# Altium PCB Odrive.PcbDoc (part 3 of 4)
Units mil, origin at the board's own origin, x right, y up, seen from the top; angles counter-clockwise.
Board outline 2874.02 x 1968.5 mil, 4 copper layers (Top Layer, Power, Signal, Bottom Layer), stack 74.892 mil thick; 198 components, 162 nets, 717 pads, 948 vias.
Unrouted connection lines stored in the file: 81.
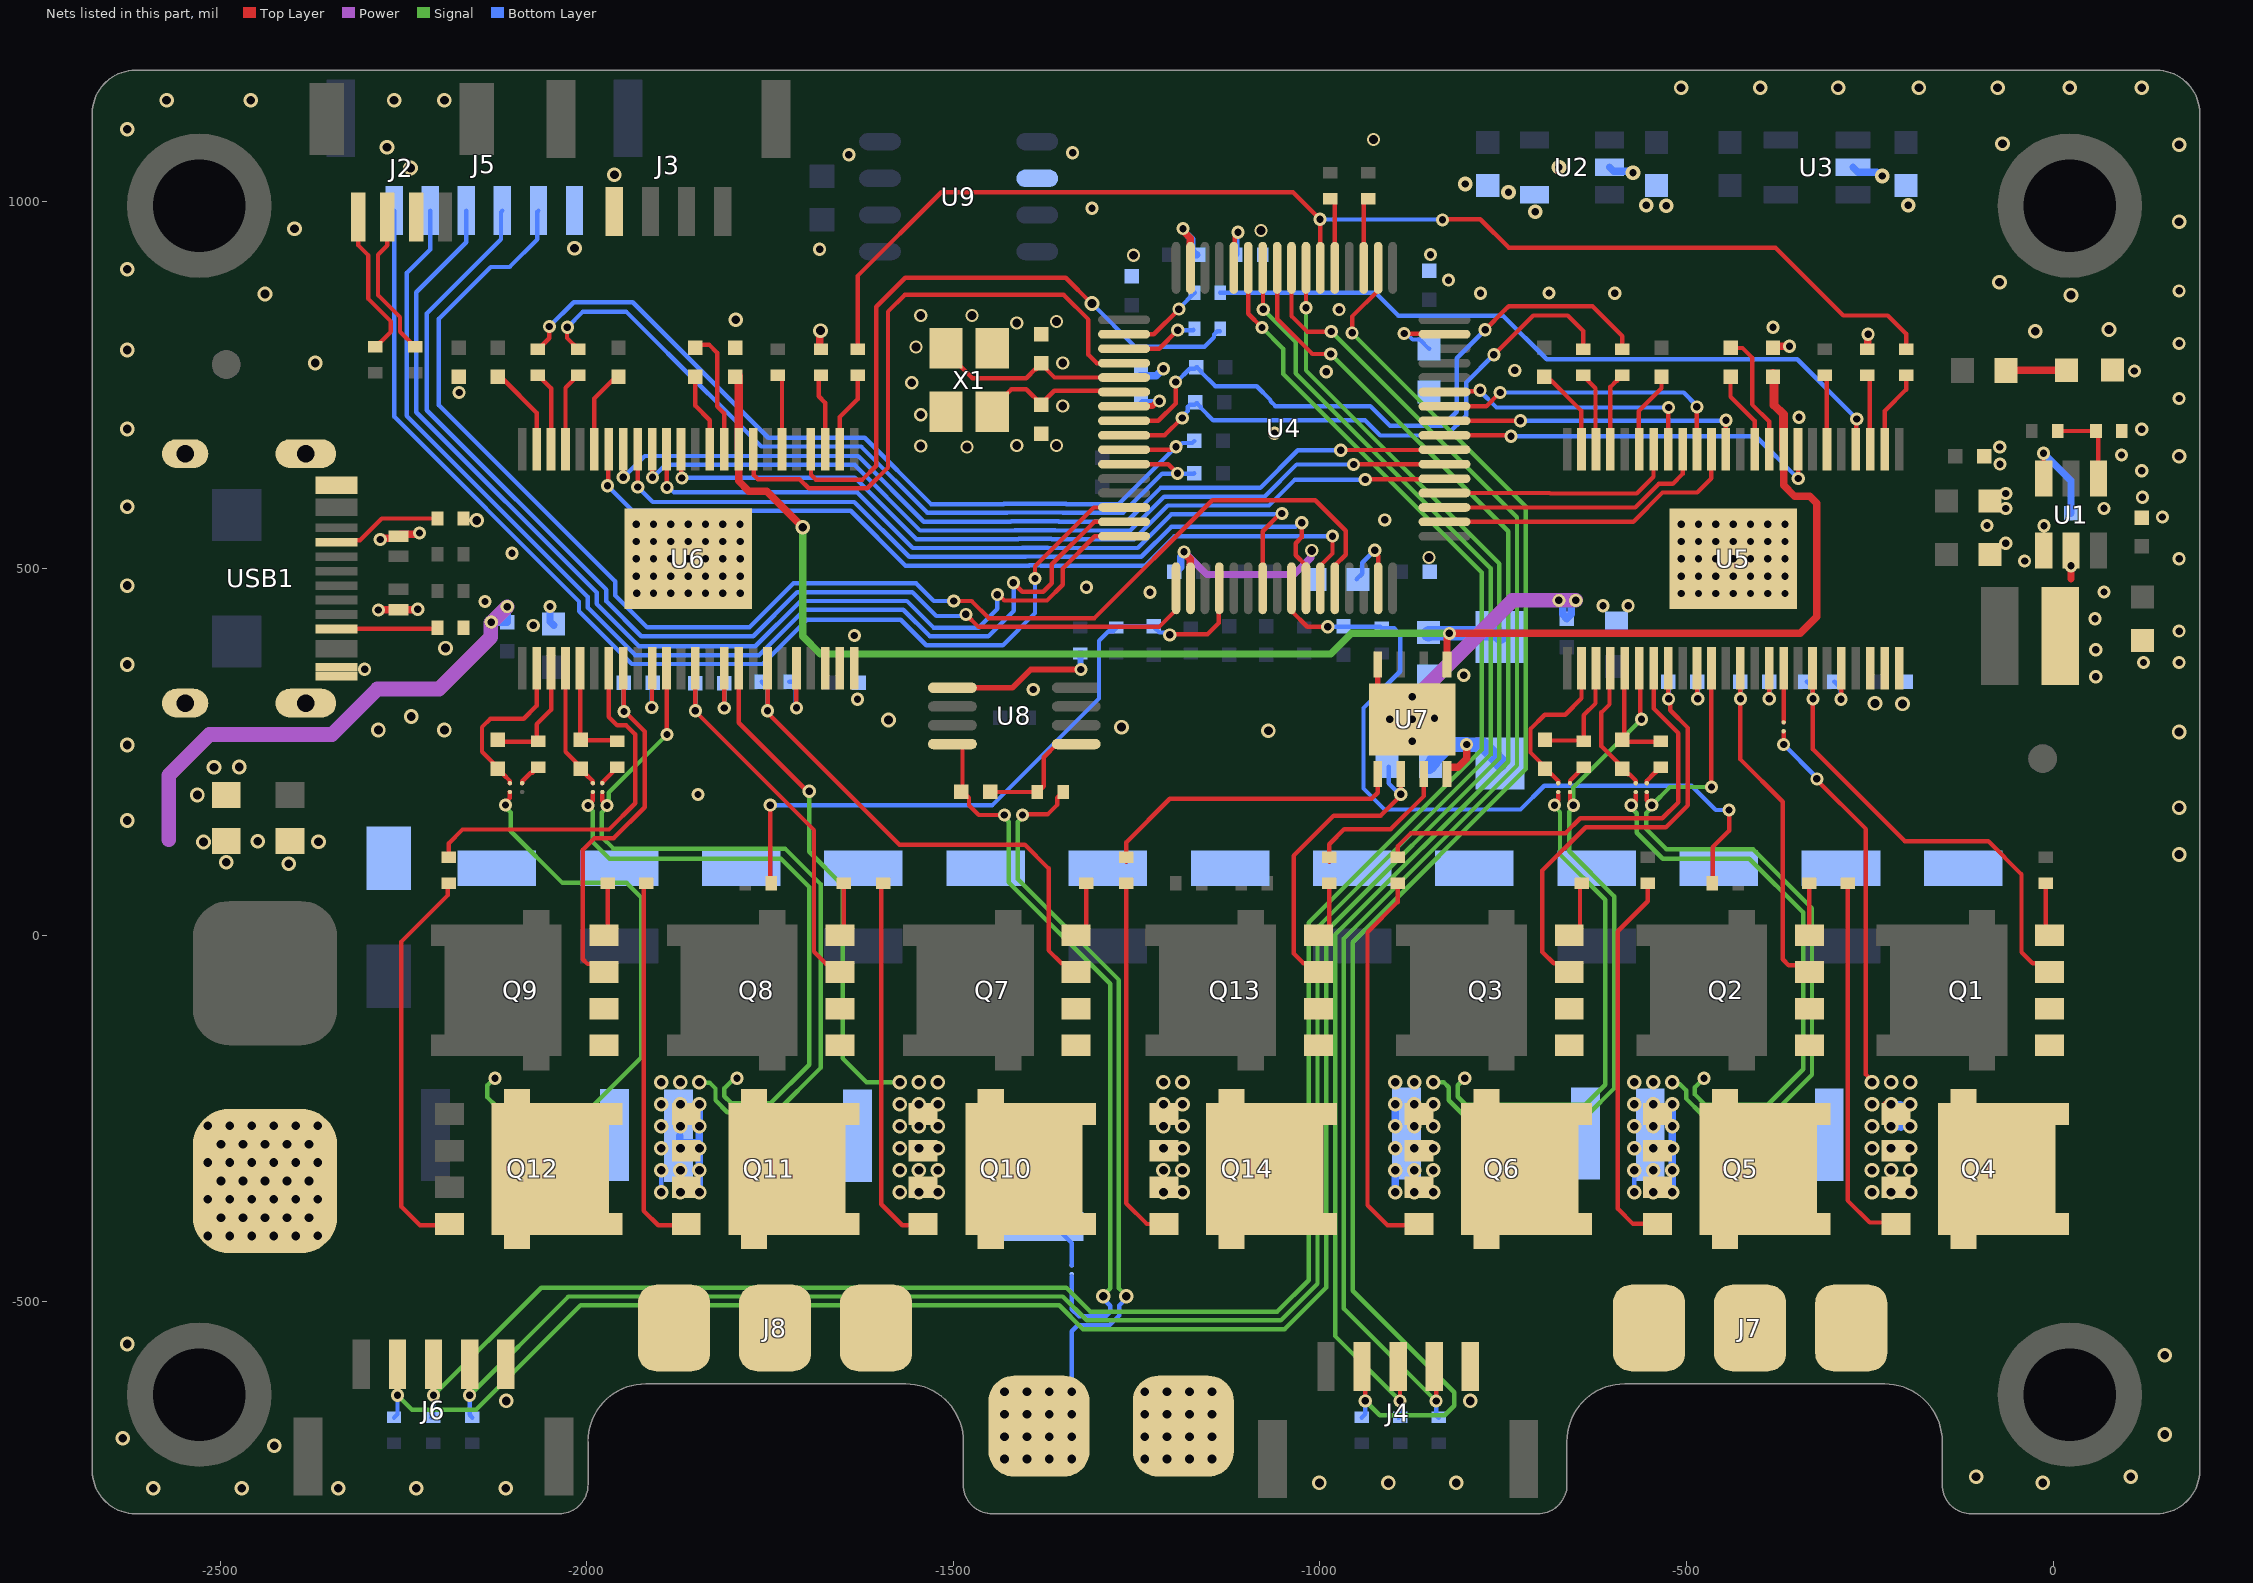
[diagram p4: the nets of this part, all layers, seen from the top]

## Via types
v1: diameter 20, hole 12, Top Layer to Bottom Layer, tented both sides, 616 vias
v2: diameter 18, hole 10, Top Layer to Bottom Layer, tented both sides, 296 vias
v3: diameter 18, hole 12, Top Layer to Bottom Layer, tented both sides, 18 vias
v4: diameter 20, hole 10, Top Layer to Bottom Layer, tented both sides, 18 vias

## Nets (pads, with @x,y where several pads share a name; then routed paths per layer and width w, separated by ;. In a path a pad name is that pad's centre, name@x,y a point inside that pad or via, vN(x,y) a via of type N, cw(c..) or ccw(c..) an arc to the next point about the centre after c; other vN are vias at no path point) (continued)
GL_C: R32.1 U5.31 | length 620.3
  Top Layer w6: R32.1@-894.12,105.38 -894.12,121.09 -875.97,139.24 -664.96,139.24 -644.85,159.35 -533.11,159.35 -511.35,181.12 -511.35,275.65 -544.81,309.11 U5.31@-544.81,364.17
GL_C_nP: R48.2 U6.31 | length 503.3
  Top Layer w6: R48.2@-2187.84,105.38 -2187.84,125.57 -2169.3,144.11 -1969.56,144.11 -1933.61,180.05 -1933.61,273.81 -1945.95,286.15 -1958.23,286.15 -1969.81,297.72 U6.31@-1969.81,364.17
GND: C2.1 C3.1 C4.1 C5.1 C6.1 C20.1 C21.1 C23.1 C25.1 C26.1 C27.1 C28.1 C29.2 C30.2 C31.1 C32.1 C33.1 C34.1 C35.1 C38.1 C40.1 C51.1 C53.1 C55.1 C66.1 D4.2 D5.2 FB1.1 J2.2 J3.4 J4.5 J5.6 J6.5 LED1.2 R2.1 R6.1 R8.2 R18.2 R28.2 R44.2 U1.1 U2.2 U2.4 U3.2 U4.18 U4.63 U5.46 U5.47 U5.48 U5.49 U6.46 U6.47 U6.48 U6.49 U9.2 USB1.0 USB1.A1 USB1.A12 USB1.B1 USB1.B12 X1.G | length 715.4
  Top Layer w10: v2(-2284.02,443.55) -2283.55,444.02 -2230.87,444.02 v2(-2230.4,444.49) ; v2(-2281.37,539.74) -2279.21,539.74 -2277.48,541.47 -2259.29,541.47 D5.2@-2256.42,544.35 -2253.76,547.01 -2229.47,547.01 v2(-2227.94,548.54) ; R44.2@-1683.54,801.42 -1682.32,802.64 -1682.32,823.33 v1(-1681.1,824.55) ; v2(-1186.65,963.61) -1185.12,962.08 -1185.12,959 -1176.87,950.75 -1176.87,910.47 U4.63@-1176.52,910.12 ; v2(-1185.31,522.73) -1185.31,521.31 -1176.87,512.87 -1176.87,473.46 U4.18@-1176.53,473.11 ; C40.1@-382.14,803.3 v2(-359.54,803.3) ; R28.2@-253.68,798.57 -253.07,799.18 -253.07,818.95 v2(-252.45,819.57)
  Power w10: v2(-1185.31,522.73) -1154.51,491.93 -1035.47,491.93 -1012.68,514.72 -1012.68,523.31 v3(-1011.15,524.84)
  Bottom Layer w10: v2(-2050.08,448.3) -2050.08,427.55 C66.1@-2045.08,422.55 ; C28.1@-1245.35,763.05 -1223.01,763.05 -1213.65,772.41 v2(-1213.46,772.41) ; C32.1@-1196.77,495.65 -1195.79,495.65 -1189.96,501.48 -1189.96,515.91 -1185.31,520.56 v2(-1185.31,522.73) ; v2(-1186.65,963.61) -1186.65,960.96 -1174.99,949.3 -1174.99,933.96 -1169.16,928.13 C35.1@-1168.18,928.13 ; U2.2@-605,1047.17 -599.66,1041.83 -574.95,1041.83 v4(-573.03,1039.92) ; U3.2@-272.99,1047.17 -266.17,1040.36 -240.69,1040.36 -235.69,1035.36 v4(-232.99,1035.36)
  other v1: -2591,-754.21 -2470.36,-754.21 -2338.73,-754.21 -2232.42,-754.21 -2110.39,-754.21 -1000.71,-746.9 -906.68,-746.9 -814.11,-746.9 -14.36,-746.9 -105.16,-738.41 105.64,-738.41 -2425.92,-696.14 -2632.72,-685.92 152.21,-680.82 -2109.54,-635.04 -794.9,-635.04 152.21,-572.95 -2626.61,-557.55 171.67,110.13 -2626.61,156.49 171.67,173.98 -2530.85,191.23 -2508.2,229.12 -2473.74,229.34 -2626.61,259.39 171.67,277.11 -1070.31,278.89 -2284.02,279.83 -2194.05,279.83 -1270.69,283.78 -1588.33,293.46 -2239.29,298.19 -243.05,316.11 -205.53,315.48 -2626.61,369.25 -2192.46,391.49 -2626.61,476.71 -2149.96,565.73 -2626.61,584.22 171.67,653.22 -2626.61,690.43 -2370.01,780.28 -2626.61,798 -24.47,823.75 76.1,826.12 -1796.73,839.25 24.31,872.93 -2438.57,874.53 -73.31,890.35 -2626.61,908.14 -2016.51,936.73 -2398.53,963.43 171.67,973.06 -1962.21,1037.18 -2240.25,1046.23 -2272.39,1074.59 171.67,1078.04 -69.22,1079.29 -2626.61,1099.15 -2572.87,1138.76 -2458.18,1138.76 -2262.57,1138.76 -2194.05,1138.76 -507.41,1155.71 -399.65,1155.71 -293.29,1155.71 -183.16,1155.71 -75.78,1155.71 22.64,1155.71 120.78,1155.71
  other v2: -1848.05,191.8 -1630.54,321.7 -1390.97,335.14 58.08,352.55 -803.92,354.41 -2302.83,362.69 123.15,371.9 171.67,371.9 58.08,389.18 -1634.9,408.72 171.67,414.73 -2072.91,422.55 56.96,431.69 -613.92,449.3 -579.71,449.3 -2138.69,455.05 -1931.85,466.38 -1908.79,466.38 -1885.17,466.38 -1861.54,466.38 -1837.92,466.38 -1814.3,466.38 -1790.68,466.38 -507.41,466.06 -483.79,466.06 -460.17,466.06 -436.54,466.06 -412.92,466.06 -389.3,466.06 -365.68,466.06 -1231.65,467.61 69.24,467.94 -1318.53,474.6 -1932.41,489.68 -1908.79,489.68 -1885.17,489.68 -1861.54,489.68 -1837.92,489.68 -1814.3,489.68 -1790.68,489.68 -507.41,489.68 -483.79,489.68 -460.17,489.68 -436.54,489.68 -412.92,489.68 -389.3,489.68 -365.68,489.68 -39.03,510.34 -1932.41,513.3 -1908.79,513.3 -1885.17,513.3 -1861.54,513.3 -1837.92,513.3 -1814.3,513.3 -1790.68,513.3 -507.41,513.3 -483.79,513.3 -460.17,513.3 -436.54,513.3 -412.92,513.3 -389.3,513.3 -365.68,513.3 171.67,513.3 -2101.73,520.86 -64.7,534.61 -1932.41,536.93 -1908.79,536.93 -1885.17,536.93 -1861.54,536.93 -1837.92,536.93 -1814.3,536.93 -1790.68,536.93 -507.41,536.93 -483.79,536.93 -460.17,536.93 -436.54,536.93 -412.92,536.93 -389.3,536.93 -365.68,536.93 -90.29,558.78 -12.66,558.41 -1932.38,560.52 -1908.79,560.55 -1885.17,560.55 -1861.54,560.55 -1837.92,560.55 -1814.3,560.55 -1790.86,560.55 -507.41,560.55 -483.79,560.55 -460.17,560.55 -436.54,560.55 -412.92,560.55 -389.3,560.55 -365.68,560.55 -911.6,566.37 148.84,570.22 -64.7,581.81 69.24,582.03 121.61,597.13 -64.7,602.28 120.78,633.4 -72.47,642.41 93.09,654.99 -72.8,665.75 -1062.04,684.42 120.78,689.89 -346.58,706.47 171.67,731.83 -2173.97,740.14 -991.31,768.43 110.7,769.32 -734.33,770.3 171.67,807.07 -382.14,829.09 -973.8,853.12 -780.99,875.4 -597.9,875.4 -687.54,875.81 171.67,878.71 -824.59,893.4 -849.18,928.13 -1682.32,935.45 -1310.95,991.4 -1642.35,1064.41 -1337.32,1067.18
  other v3: -851.28,514.99 -1481.26,665.6 -1544.47,667.25 -1413.51,668 -1359.36,668 -1544.47,709.88 -1350.77,721.87 -1556.54,753.3 -1350.77,780.2 -1550.97,802.2 -1413.51,835.08 -1359.36,837.11 -1544.47,845.16 -1474.31,845.16 -1254.36,927.41 -1080.24,960.84 -927.12,1085.12
  other v4: -706.54,986.56 -527.5,994.79 -555.09,995.55 -197.47,995.55 -742.82,1013.21 -801.64,1024.35 -674.02,1047.17
GPIO_1: J5.1 U4.14 | length 1578.5
  Top Layer w6: v2(-1388.61,486.47) -1388.61,503.16 -1308.41,583.35 U4.14@-1267.08,583.35
  Bottom Layer w6: J5.1@-2262.57,988.17 -2262.57,707.29 -2010.39,455.11 -2010.39,441.85 -1938.46,369.91 -1760.01,369.91 -1699.58,430.34 -1571.7,430.34 -1536.9,395.54 -1432.37,395.54 -1388.61,439.3 v2(-1388.61,486.47)
GPIO_2: J5.2 U4.15 | length 1569.1
  Top Layer w6: v2(-1418.03,480.69) -1405.8,468.47 -1377.19,468.47 -1365.58,480.08 -1365.58,505.99 -1307.9,563.66 U4.15@-1267.08,563.66
  Bottom Layer w6: J5.2@-2213.36,988.17 -2213.36,935.08 -2245.25,903.19 -2245.25,708.23 -1998.39,461.37 -1998.39,446.82 -1933.49,381.91 -1764.98,381.91 -1703.07,443.82 -1568.21,443.82 -1531.93,407.54 -1452.09,407.54 -1417.33,442.31 -1417.33,479.99 v2(-1418.03,480.69)
GPIO_3: J5.3 U4.16 | length 1533
  Top Layer w6: v2(-1439.84,464.44) -1438.3,464.44 -1430.33,456.47 -1372.22,456.47 -1350.83,477.86 -1350.83,500.16 -1307,543.98 U4.16@-1267.08,543.98
  Bottom Layer w6: J5.3@-2164.14,988.17 -2164.14,944.88 -2232.36,876.66 -2232.36,713.28 -1986.39,467.31 -1986.39,451.79 -1928.52,393.91 -1769.95,393.91 -1708.04,455.82 -1563.24,455.82 -1526.96,419.54 -1465.38,419.54 -1439.84,445.08 v2(-1439.84,464.44)
GPIO_4: J5.4 U4.17 | length 1559
  Top Layer w6: v2(-1482.87,437.56) -1465.78,420.47 -1219.33,420.47 -1196.21,443.59 U4.17@-1196.21,473.11
  Bottom Layer w6: J5.4@-2114.93,988.17 -2116.77,986.32 -2116.77,949.22 -2218.09,847.9 -2218.09,715.98 -1973.1,470.99 -1973.1,455.47 -1925.49,407.86 -1772.97,407.86 -1713.01,467.82 -1555.73,467.82 -1523.18,435.26 -1485.16,435.26 v2(-1482.87,437.56)
GPIO_5: J5.5 U4.28 | length 1922.7
  Top Layer w6: v2(-1499.27,455.71) -1475.05,455.71 -1451.81,432.47 -1307.48,432.47 -1146.88,593.06 -1006.26,593.06 -964.89,551.69 -964.89,518.82 -979.68,504.03 U4.28@-979.68,473.11
  Bottom Layer w6: J5.5@-2065.72,988.17 -2067.18,986.71 -2067.18,949.22 -2105.07,911.32 -2130.7,911.32 -2201.55,840.48 -2201.55,722.95 -1961.1,482.5 -1961.1,463.33 -1917.62,419.86 -1777.94,419.86 -1717.98,479.82 -1550.76,479.82 -1526.65,455.71 v2(-1499.27,455.71)
GVDD: C40.2 C55.2 C69.2 D3.2 U5.9 U6.9 U7.1 | length 2332.1
  Top Layer w10: U6.9@-1792.65,662.44 -1792.65,619.48 -1778.74,605.57 -1754.55,605.57 v1(-1705.38,556.4) ; U7.1@-826.73,369 -826.73,406.2 -823.49,409.44 v2(-823.49,411.61) -345.06,411.61 -322.37,434.29 -322.37,589.25 -331.89,598.78 -352.86,598.78 -367.65,613.57 U5.9@-367.65,662.44
  Top Layer w12: U6.9@-1792.65,662.44 C55.2@-1792.65,762.44 ; C40.2@-382.14,765.9 -380.75,764.51 -380.75,723.13 -367.65,710.03 U5.9@-367.65,662.44
  Signal w10: v1(-1705.38,556.4) -1705.38,407.58 -1681.24,383.44 -985.12,383.44 -956.96,411.61 v2(-823.49,411.61)
  Bottom Layer w20: C69.2@-852.2,410.6 -851.2,411.61 -759.01,411.61 D3.2@-754.28,406.88
M0_ENC_A: J4.4 R14.1 U4.56 | length 1913.9
  Top Layer w6: U4.56@-1038.73,910.12 -1038.73,844.32 -1017.65,823.23 v2(-984.64,823.23) ; J4.4@-844.11,-588.33 -841.57,-590.87 v2(-841.57,-635.25)
  Signal w6: v2(-984.64,823.23) -731.25,569.84 -731.25,231.58 -967.31,-4.48 -967.31,-509.51 v2(-841.57,-635.25)
  Bottom Layer w6: v2(-841.57,-635.25) -841.57,-654.52 R14.1@-838.2,-657.89
M0_ENC_B: J4.3 R13.1 U4.57 | length 1896.3
  Top Layer w6: U4.57@-1058.41,910.12 -1058.41,840.77 -1010.28,792.64 v2(-985.14,792.64) ; J4.3@-893.32,-588.33 -890.82,-590.83 v2(-890.82,-635.04)
  Signal w6: v2(-985.14,792.64) -743.25,550.75 -743.25,236.55 -979.31,0.49 -979.31,-546.56 v2(-890.82,-635.04)
  Bottom Layer w6: R13.1@-892.87,-657.89 -890.82,-655.84 v2(-890.82,-635.04)
M0_ENC_Z: J4.2 R12.1 U4.50 | length 2028.4
  Top Layer w6: v2(-956.12,821.41) -956.12,843.7 -920.62,879.2 U4.50@-920.62,910.12 ; J4.2@-942.53,-588.33 -938.15,-592.72 v2(-938.15,-635.04)
  Signal w6: v2(-956.12,821.41) -719.25,584.54 -719.25,226.61 -955.31,-9.45 -955.31,-484.73 -816.72,-623.33 -816.72,-641.72 -829.83,-654.83 -918.36,-654.83 v2(-938.15,-635.04)
  Bottom Layer w6: R12.1@-943.16,-657.89 -938.15,-652.88 v2(-938.15,-635.04)
M0_nCS: R21.1 U5.4 | length 981.7
  Top Layer w6: U5.4@-269.22,662.44 -268.59,663.07 -268.59,703.4 v2(-267.96,704.03)
  Bottom Layer w6: R21.1@-1136.33,876.04 -924.19,876.04 -892.95,844.8 -750.31,844.8 -690.82,785.3 -349.23,785.3 v2(-267.96,704.03)
M0_SN1: NT2.1 R33.1 | length 30.6
  Top Layer w6: NT2.1@-554.36,207.33 -554.36,210.37 -543.23,221.49 -542.73,221.49 -535.1,229.12 R33.1@-535.1,229.63
M0_SN2: NT3.1 R38.1 | length 30
  Top Layer w6: NT3.1@-658.94,207.33 -658.94,210.6 -640.42,229.12 R38.1@-640.42,229.63
M0_SP1: C45.1 NT4.1 U5.28 | length 182.4
  Top Layer w6: U5.28@-603.87,364.17 -605.15,362.89 -605.15,314.77 -616.08,303.84 -616.08,257.66 -587.76,229.34 -587.76,227.37 -579.93,219.54 -577.96,219.54 -569.32,210.89 NT4.1@-569.32,207.33
M0_SP2: C46.1 NT5.1 U5.26 | length 218.5
  Top Layer w6: NT5.1@-674.99,207.33 -674.99,210.27 -684.27,219.54 -685.25,219.54 -693.08,227.37 -693.08,228.35 -693.08,229.34 -712.91,249.16 -712.91,281.29 -693.42,300.77 -665.62,300.77 -643.24,323.16 -643.24,363.57 U5.26@-643.83,364.17
M0_TEMP: C37.2 R23.1 RT1.2 U4.25 | length 1070.3
  Top Layer w6: U4.25@-1038.73,473.11 -1038.73,442.19 -1017.22,420.68 v2(-989.45,420.68) ; RT1.2@-464.29,70.8 -464.29,120.13 -442.05,142.37 v2(-442.05,170.77)
  Bottom Layer w6: v2(-989.45,420.68) -968.01,420.68 -967.89,420.81 -917.74,420.81 -915.87,418.94 -898.9,418.94 -890.57,410.6 -890.57,359.93 -940.63,309.87 -940.63,200.08 -911.99,171.43 -726.52,171.43 -694.14,203.81 -493.27,203.81 -460.22,170.77 v2(-442.05,170.77)
M1_ENC_A: J6.4 R17.1 U4.58 | length 2932.7
  Top Layer w6: v2(-2159.6,-627.48) J6.4@-2159.6,-585.08 ; U4.58@-1078.1,910.12 -1077.7,909.72 -1077.7,853.82 v2(-1077.31,853.42)
  Signal w6: v2(-2159.6,-627.48) -2024.85,-492.73 -1350.71,-492.73 -1318.17,-525.26 -1053.17,-525.26 -1003.31,-475.4 -1003.31,10.43 -767.25,246.49 -767.25,500.4 -1033.02,766.17 -1033.02,809.13 v2(-1077.31,853.42)
  Bottom Layer w6: v2(-2159.6,-627.48) -2159.6,-654.08 R17.1@-2155.8,-657.89
M1_ENC_B: J6.3 R16.1 U4.59 | length 2969.8
  Top Layer w6: v2(-2208.81,-627.48) J6.3@-2208.81,-585.08 ; U4.59@-1097.78,910.12 -1097.78,847.47 v2(-1079.02,828.7)
  Signal w6: v2(-2208.81,-627.48) -2062.06,-480.73 -1345.74,-480.73 -1313.2,-513.26 -1058.14,-513.26 -1015.31,-470.43 -1015.31,17.17 -779.25,253.24 -779.25,494.67 -1049.88,765.3 -1049.88,799.56 v2(-1079.02,828.7)
  Bottom Layer w6: R16.1@-2211.75,-657.89 -2208.81,-654.95 v2(-2208.81,-627.48)
M1_ENC_Z: J6.2 R15.1 U4.55 | length 3043.3
  Top Layer w6: v2(-2258.02,-627.48) J6.2@-2258.02,-585.08 ; v2(-1019.04,855.69) U4.55@-1019.05,910.12
  Signal w6: v2(-2258.02,-627.48) -2238.24,-647.26 -2150.8,-647.26 -2008.27,-504.73 -1355.68,-504.73 -1323.14,-537.26 -1048.2,-537.26 -991.31,-480.37 -991.31,5.46 -755.25,241.52 -755.25,506.47 -1019.04,770.27 v2(-1019.04,855.69)
  Bottom Layer w6: R15.1@-2262.71,-657.89 -2258.02,-653.2 v2(-2258.02,-627.48)
M1_nCS: R22.1 U6.4 | length 886.2
  Top Layer w6: U6.4@-1694.22,662.44 -1694.08,662.3 -1694.08,627.92 -1687.52,621.36 -1623.86,621.36 -1605.03,640.19 -1605.03,857.16 -1565.61,896.58 -1346.6,896.58 -1311.58,861.56 v1(-1310.95,861.56)
  Bottom Layer w6: v1(-1310.95,861.56) -1310.95,861.32 -1252.13,802.49 -1157.45,802.49 -1144.46,815.48 -1144.46,819.17 -1140.02,823.61 R22.1@-1136.33,823.61
M1_SN1: NT7.1 R49.1 | length 30.3
  Top Layer w6: NT7.1@-1978.5,207.33 -1978.5,208.63 R49.1@-1958,229.12
M1_SN2: NT8.1 R54.1 | length 32.8
  Top Layer w6: NT8.1@-2087.99,207.33 -2087.99,209.88 -2076.37,221.49 -2073.87,221.49 -2066.24,229.12 R54.1@-2066.24,229.63
M1_SP1: C60.1 NT9.1 U6.28 | length 172
  Top Layer w6: U6.28@-2028.87,364.17 -2028.87,250.22 -2007.98,229.34 C60.1@-2007.98,228.35 ; C60.1@-2009.47,226.86 -2002.15,219.54 -2001.17,219.54 -1991.5,209.87 NT9.1@-1991.5,207.33
M1_SP2: C61.1 NT10.1 U6.26 | length 230.1
  Top Layer w6: NT10.1@-2104.61,207.33 -2104.61,210.33 -2113.83,219.54 -2114.02,219.54 -2121.85,227.37 -2121.85,228.35 -2121.85,229.34 -2142.66,250.15 -2142.66,283.86 -2131.24,295.28 -2085.94,295.28 -2068.24,312.98 U6.26@-2068.24,364.17
M1_TEMP: C52.2 R39.2 RT2.2 U4.20 | length 924.6
  Top Layer w6: v2(-1749.5,177.4) -1749.5,71.35 RT2.2@-1748.95,70.8 ; v2(-1204.79,409.55) -1204.09,410.25 -1153.36,410.25 -1137.88,425.73 -1137.88,472.38 U4.20@-1137.15,473.11
  Bottom Layer w6: v2(-1749.5,177.4) -1446.68,177.4 -1301.26,322.83 -1301.26,401.48 -1288,414.74 -1281.86,414.74 -1274.93,421.67 C52.2@-1226.77,421.67 ; C52.2@-1225.26,421.27 -1225.26,419.19 -1218.94,412.86 -1211.34,412.86 -1208.03,409.55 v2(-1204.79,409.55)
NetC1_1: C1.1 L1.1 U1.2 | length 70.8
  Top Layer w10: 24.31,485.96 U1.2@24.31,524.47
  Bottom Layer w10: v2(24.3,503.67) C1.1@24.31,535.96
NetC1_2: C1.2 U1.6 | length 131.7
  Top Layer w6: v2(-13.27,657.16) -13.27,623.06 U1.6@-13.09,622.89
  Bottom Layer w10: v2(-13.27,657.16) 24.31,619.59 C1.2@24.31,575.33
NetC26_2: C26.2 U4.47 | length 98.3
  Top Layer w6: v2(-885.18,820.61) -884.66,820.09 -830.59,820.09 U4.47@-830.07,819.57
  Bottom Layer w6: v2(-885.18,820.61) -881.93,820.61 -873.65,812.33 -863.93,812.33 C26.2@-851.18,799.58
NetC27_2: C27.2 U4.31 | length 103.8
  Top Layer w6: v2(-925.14,525.04) -925.14,521.79 -920.62,517.27 U4.31@-920.62,473.11
  Bottom Layer w6: C27.2@-950.02,485.33 -942.27,493.07 -942.27,507.91 v2(-925.14,525.04)
NetC39_2: C39.2 U5.44 | length 70.4
  Top Layer w6: v2(-289.31,321.92) -289.11,322.12 -289.11,363.97 U5.44@-288.91,364.17
  Bottom Layer w6: C39.2@-298.75,345.45 -297.77,345.45 -289.94,337.63 -289.94,322.55 v2(-289.31,321.92)
NetC41_1: C41.1 U5.10 | length 170.8
  Top Layer w6: C41.1@-440.04,803.3 -437.59,800.86 -423.72,800.86 -410.63,787.77 -410.63,723.83 -387.33,700.53 U5.10@-387.33,662.44
NetC41_2: C41.2 U5.11 | length 116.9
  Top Layer w6: C41.2@-440.04,765.9 -440.04,734.24 -407.21,701.41 U5.11@-407.21,662.63
NetC42_2: C42.2 U5.39 | length 64.9
  Top Layer w6: U5.39@-387.33,364.17 -387.21,364.05 v2(-387.21,322.37)
  Bottom Layer w6: v2(-387.21,322.37) C42.2@-387.21,345.42 C42.2@-387.18,345.45
NetC43_2: C43.2 U5.34 | length 65.7
  Top Layer w6: U5.34@-485.76,364.17 -485.19,363.6 -485.19,322.95 v2(-484.62,322.38)
  Bottom Layer w6: C43.2@-485.6,345.45 -484.62,344.47 v2(-484.62,322.38)
NetC44_1: C44.1 U5.19 | length 116.3
  Top Layer w6: U5.19@-565.09,662.44 -565.09,714.81 -534.14,745.76 C44.1@-534.14,765.9
NetC45_2: C45.2 R33.2 U5.29 | length 156.7
  Top Layer w6: U5.29@-584.18,364.17 -584.78,363.57 -584.78,271.07 -590.1,265.75 -588.05,263.71 R33.2@-535.1,263.71
NetC46_2: C46.2 R38.2 U5.27 | length 160.6
  Top Layer w6: C46.2@-693.08,265.75 -692.84,265.51 R38.2@-640.42,265.51 ; R38.2@-640.42,263.71 -640.42,299.85 -624.15,316.11 -624.15,364.17 U5.27@-623.55,364.17
NetC47_2: C47.2 R34.2 U4.8 | length 904.2
  Top Layer w6: U4.8@-1267.08,701.46 -1220.36,701.46 -1196.77,725.05 v2(-1196.77,754.44) ; v2(-774.7,825.69) -748.17,852.22 ; -748.17,852.25 -742.61,857.81 -628.32,857.81 -587.47,816.96 R34.2@-587.47,799.24 R34.2@-587.47,798.57
  Bottom Layer w6: v2(-1196.77,754.44) -1195.67,754.44 -1177.7,772.41 C47.2@-1170.59,772.41 ; C47.2@-1168.51,774.49 -1167.52,774.49 -1162.76,769.73 -1162.76,768.75 -1142.53,748.51 -1086.15,748.51 -1067.45,729.81 -1067.45,728.34 -1060.72,721.61 -931.4,721.61 -904.5,694.72 -832.72,694.72 -813.46,713.97 -813.46,786.92 v2(-774.7,825.69)
NetC48_2: C48.2 R37.2 U4.9 | length 792.5
  Top Layer w6: U4.9@-1267.08,681.77 -1211.82,681.77 -1188.22,705.37 v2(-1187.79,705.37) ; v2(-762.74,791.49) -709.13,845.1 -661.89,845.1 -640.81,824.02 R37.2@-640.81,799.07
  Bottom Layer w6: v2(-1187.79,705.37) -1187.79,707.48 -1180.38,714.89 -1180.38,720.49 -1177.65,723.22 C48.2@-1170.59,723.22 ; C48.2@-1168.53,725.28 -1167.55,725.28 -1162.76,720.49 -1162.76,719.51 -1145.68,702.42 -938.48,702.42 -917.59,681.53 -827.6,681.53 -800.61,708.52 -800.61,753.75 -762.87,791.49 v2(-762.74,791.49)
NetC49_2: C49.2 U5.23 | length 124.9
  Top Layer w6: C49.2@-694.14,765.9 -694.14,764.92 -686.31,757.09 -685.33,757.09 -643.83,715.6 U5.23@-643.83,662.44
NetC54_2: C54.2 U6.44 | length 98.8
  Top Layer w6: v2(-1713.91,310.02) U6.44@-1713.91,364.17
  Bottom Layer w6: C54.2@-1723.91,345.45 -1715.26,345.45 -1715.09,345.29 -1715.09,311.21 v2(-1713.91,310.02)
NetC56_1: C56.1 U6.10 | length 170.2
  Top Layer w6: C56.1@-1851.7,805.42 -1833.07,805.42 -1822.1,794.45 -1822.1,721.37 -1812.55,711.82 -1812.55,662.66 U6.10@-1812.33,662.44
NetC56_2: C56.2 U6.11 | length 113.7
  Top Layer w6: C56.2@-1851.7,768.01 -1851.7,722.05 -1832.02,702.36 U6.11@-1832.02,662.44
NetC57_2: C57.2 U6.39 | length 90.1
  Top Layer w6: v2(-1812.33,309.75) U6.39@-1812.33,364.17
  Bottom Layer w6: v2(-1812.33,309.75) C57.2@-1812.33,345.45
NetC58_2: C58.2 U6.34 | length 88.5
  Top Layer w6: v2(-1911.11,310.7) -1910.93,310.88 -1910.93,363.99 U6.34@-1910.76,364.17
  Bottom Layer w6: v2(-1911.11,310.7) -1911.11,345.1 C58.2@-1910.76,345.45
NetC59_1: C59.1 U6.19 | length 117.1
  Top Layer w6: U6.19@-1989.5,662.44 -1989.5,731.97 -1956.54,764.92 C59.1@-1956.54,765.9
NetC60_2: C60.2 R49.2 U6.29 | length 149.7
  Top Layer w6: U6.29@-2009.18,364.17 -2008.81,363.8 -2008.81,266.58 -2007.98,265.75 -1960.05,265.75 R49.2@-1958,263.71
NetC61_2: C61.2 R54.2 U6.27 | length 165.9
  Top Layer w6: C61.2@-2121.85,265.75 -2119.8,263.71 -2066.24,263.71 -2068.24,265.71 -2068.24,287.73 -2048.55,307.41 U6.27@-2048.55,364.17
NetC62_2: C62.2 R52.2 U4.11 | length 1115
  Top Layer w6: v2(-2026.29,829.22) -2026.85,828.66 -2026.85,814.38 -2011.54,799.07 R52.2@-2011.54,798.57 ; U4.11@-1267.08,642.4 -1206.75,642.4 v2(-1194.16,629.81)
  Bottom Layer w6: v2(-2026.29,829.22) -2005.54,849.97 -1945.78,849.97 -1834.24,738.43 -1833.96,738.43 -1761.96,666.43 -1625.78,666.43 -1535.33,575.98 -1426.37,575.98 -1425.88,576.47 -1351.33,576.47 -1350.84,575.98 -1268.49,575.98 -1214.93,629.54 -1194.43,629.54 v2(-1194.16,629.81) ; v2@-1194.16,629.54 -1171.87,629.54 C62.2@-1171.57,629.84
NetC63_2: C63.2 R53.2 U4.10 | length 1153.8
  Top Layer w6: R53.2@-2066.54,798.57 -2066.54,799.07 -2058.91,806.7 -2058.41,806.7 -2050.85,814.26 v2(-2050.85,830.12) ; U4.10@-1267.08,662.09 -1203.45,662.09 -1199.51,666.03 v2(-1196.26,666.03)
  Bottom Layer w6: v2(-2050.85,830.12) -2017.76,863.21 -1937.26,863.21 -1752.48,678.43 -1620.81,678.43 -1530.36,587.98 -1431.34,587.98 -1430.86,588.47 -1346.36,588.47 -1345.87,587.98 -1274.31,587.98 v2(-1196.26,666.03) -1193.01,666.03 -1187.79,671.25 -1174.35,671.25 C63.2@-1171.57,674.03
NetC64_2: C64.2 U6.23 | length 126.1
  Top Layer w6: C64.2@-2121.54,765.9 -2121.54,764.92 -2114.72,758.09 -2113.73,758.09 -2068.24,712.6 U6.23@-2068.24,662.44
NetC68_1: C68.1 J9.1 Q13.S Q14.D U7.6 | length 432.8
  Top Layer w6: Q13.S@-1002,-50.11 -1013.76,-38.35 -1022.48,-38.35 -1035.83,-25 -1035.83,108.55 -981.27,163.11 -917.04,163.11 -889.72,190.43 U7.6@-889.72,219.79
  Bottom Layer w6: C68.1@-906.32,229.98 -906.32,207.04 -891.61,192.33 v2(-889.72,192.33)
  other v1: -1239,-714.48 -1208.39,-714.48 -1177.79,-714.48 -1147.18,-714.48 -1239,-683.87 -1208.39,-683.87 -1177.79,-683.87 -1147.18,-683.87 -1239,-653.27 -1208.39,-653.27 -1177.79,-653.27 -1147.18,-653.27 -1239,-622.66 -1208.39,-622.66 -1177.79,-622.66 -1147.18,-622.66
NetC68_2: C68.2 D3.1 U7.8 | length 182.7
  Top Layer w10: U7.8@-826.73,219.79 -826.73,228.27 -825.82,229.17 -811.68,229.17 -799.92,240.93 v2(-799.92,260.18)
  Bottom Layer w20: C68.2@-851.2,229.98 -845.45,235.73 -845.45,237.7 -822.97,260.18 v2(-799.92,260.18) ; v2@-800.22,260.48 -799.42,259.68 -777.75,259.68 -754.28,236.21 D3.1@-754.28,234.24
NetC70_2: C70.2 R58.2 U8.1 | length 168.1
  Top Layer w6: C70.2@-1450.05,195.34 -1384.67,195.34 -1384.16,195.34 -1376.53,202.97 -1376.53,242.6 -1358.41,260.72 U8.1@-1332.27,260.72
NetJ2_3: J2.3 R7.2 | length 204.2
  Top Layer w6: J2.3@-2271.9,979.3 -2271.9,940.67 -2284.59,927.98 -2284.59,873 -2254.52,842.93 -2254.52,823.06 -2233.51,802.04 R7.2@-2233.51,801.54
NetJ2_4: J2.4 R9.1 | length 205.3
  Top Layer w6: J2.4@-2311.27,979.3 -2311.27,940.67 -2297.65,927.06 -2297.65,867.7 -2266.9,836.94 -2266.9,822.91 -2280.13,809.67 -2280.64,809.67 -2288.27,802.04 R9.1@-2288.27,801.54
NetLED1_1: LED1.1 R3.1 | length 82.5
  Top Layer w10: R3.1@-64.31,770.36 LED1.1@18.15,770.44
NetQ1_G: Q1.G R25.2 | length 73.7
  Top Layer w6: R25.2@-10.32,71.3 -10.32,5.32 Q1.G@-4.88,-0.11
NetQ2_G: Q2.G R26.2 | length 72.6
  Top Layer w6: Q2.G@-335.41,-0.11 -332.6,2.7 R26.2@-332.6,71.3
NetQ3_G: Q3.G R27.2 | length 81.4
  Top Layer w6: Q3.G@-660,-0.11 -655.08,-0.11 -645.3,9.66 -645.3,68.87 R27.2@-642.87,71.3
NetQ4_G: Q4.G R30.2 | length 512.2
  Top Layer w6: R30.2@-280.43,71.3 -280.43,-361.65 -250.33,-391.75 -216.45,-391.75 Q4.G@-214.45,-393.75
NetQ5_G: Q5.G R31.2 | length 522.4
  Top Layer w6: R31.2@-552.98,71.3 -552.98,46.27 -593.96,5.29 -593.96,-372.87 -573.08,-393.75 Q5.G@-541.32,-393.75
NetQ6_G: Q6.G R32.2 | length 538.8
  Top Layer w6: R32.2@-894.12,71.3 -894.12,45.15 -935.12,4.15 -935.12,-368.28 -907.8,-395.61 -866.83,-395.61 Q6.G@-864.96,-393.75
NetQ7_G: Q7.G R41.1 | length 78.3
  Top Layer w6: Q7.G@-1332.64,-0.11 -1330.61,-0.11 -1318.84,11.65 R41.1@-1318.84,71.3
NetQ8_G: Q8.G R42.1 | length 71.6
  Top Layer w6: Q8.G@-1650,0 -1649.2,0.8 R42.1@-1649.2,71.3
NetQ9_G: Q9.G R43.1 | length 71.9
  Top Layer w6: R43.1@-1971.5,71.3 -1971.5,1.49 Q9.G@-1970,0
NetQ10_G: Q10.G R46.1 | length 505.7
  Top Layer w6: R46.1@-1598.09,71.3 -1598.09,-366.8 -1569.47,-395.42 -1542.66,-395.42 Q10.G@-1542.47,-395.61
NetQ11_G: Q11.G R47.1 | length 511
  Top Layer w6: R47.1@-1918.87,71.3 -1921.99,68.18 -1921.99,-376 -1902.38,-395.61 Q11.G@-1867.74,-395.61
NetQ12_G: Q12.G R48.1 | length 543.5
  Top Layer w6: Q12.G@-2188,-395.61 -2227.28,-395.61 -2252.58,-370.31 -2252.58,-8.7 -2189.2,54.68 -2189.2,69.94 R48.1@-2187.84,71.3
NetQ13_G: Q13.G R56.1 | length 79.1
  Top Layer w6: Q13.G@-1002,-0.11 -999.18,-0.11 -987.41,11.65 R56.1@-987.41,71.3
NetQ14_G: Q14.G R57.1 | length 500.1
  Top Layer w6: R57.1@-1264.14,71.3 -1264.14,-365.72 -1236,-393.87 Q14.G@-1212.74,-393.87
NetR1_1: R1.1 R2.2 U1.4 | length 119.1
  Top Layer w6: R1.1@5.76,687.6 59.01,687.6 61.22,685.38 61.22,623.38 U1.4@61.71,622.89
NetR6_2: R6.2 USB1.A5 | length 151.7
  Top Layer w6: USB1.A5@-2340.91,535.77 -2338.01,538.67 -2309.07,538.67 -2279.43,568.32 R6.2@-2202.72,568.32
NetR8_1: R8.1 USB1.B5 | length 138.9
  Top Layer w6: USB1.B5@-2340.91,417.66 -2204.48,417.66 R8.1@-2202.72,419.42
NetR18_1: R18.1 U4.60 | length 83.6
  Top Layer w6: U4.60@-1117.47,910.12 -1116.36,911.23 -1116.36,952.32 -1112.95,955.73 -1112.95,958.66 v2(-1111.68,958.66)
  Bottom Layer w6: R18.1@-1112.65,928.13 -1112.95,928.44 -1112.95,958.66 v2(-1111.68,958.66)
NetR19_2: R19.2 U4.51 | length 97.5
  Top Layer w6: U4.51@-940.31,910.12 -940.31,998.97 R19.2@-934.18,1005.09
NetR20_2: R20.2 U4.53 | length 97.7
  Top Layer w6: R20.2@-986.18,1005.09 -979.67,998.58 U4.53@-979.67,910.12
NetR21_2: R21.2 U4.2 | length 120.5
  Top Layer w6: U4.2@-1267.08,819.57 -1226.57,819.57 v2(-1192.35,853.8)
  Bottom Layer w6: v2(-1192.35,853.8) -1192.35,854.6 -1170.91,876.04 R21.2@-1170.41,876.04
NetR22_2: R22.2 U4.3 | length 105.3
  Top Layer w6: U4.3@-1267.08,799.89 -1219.1,799.89 v2(-1193.77,825.21)
  Bottom Layer w6: v2(-1193.77,825.21) -1172.96,825.21 R22.2@-1172.48,825.69
NetR24_2: R24.2 U5.2 | length 114.1
  Top Layer w6: U5.2@-229.85,662.44 -229.85,714.93 -200.68,744.09 R24.2@-200.68,764.49
NetR28_1: R28.1 U5.3 | length 103.8
  Top Layer w6: R28.1@-253.68,764.49 -249.93,760.73 -249.93,662.83 U5.3@-249.54,662.44
NetR29_2: R29.2 U5.6 | length 103.3
  Top Layer w6: R29.2@-311.68,764.49 -308.59,761.39 U5.6@-308.59,662.44
NetR34_1: R34.1 U5.21 | length 109.3
  Top Layer w6: U5.21@-603.87,662.44 -603.87,747.76 -595.28,756.35 -594.77,756.35 -587.14,763.98 R34.1@-587.14,764.49
NetR37_1: R37.1 U5.22 | length 109.5
  Top Layer w6: R37.1@-642.14,764.49 -642.14,763.98 -624.15,745.99 U5.22@-624.15,662.44
NetR40_2: R40.2 U6.2 | length 115
  Top Layer w6: U6.2@-1654.85,662.44 -1654.85,706.69 -1630.54,731 R40.2@-1630.54,767.34
NetR44_1: R44.1 U6.3 | length 108.6
  Top Layer w6: R44.1@-1683.54,767.34 -1683.54,734.92 -1674.54,725.92 U6.3@-1674.54,662.44
NetR45_2: R45.2 U6.6 | length 107.5
  Top Layer w6: R45.2@-1739.5,767.46 -1739.5,767.34 -1733.59,761.43 U6.6@-1733.59,662.44
NetR52_1: R52.1 U6.21 | length 109.2
  Top Layer w6: U6.21@-2028.87,662.44 -2028.87,746.66 -2011.54,763.98 R52.1@-2011.54,764.49
NetR53_1: R53.1 U6.22 | length 109.5
  Top Layer w6: R53.1@-2066.54,764.49 -2066.54,763.98 -2048.55,745.99 U6.22@-2048.55,662.44
NetR56_2: R56.2 U7.7 | length 210.2
  Top Layer w6: R56.2@-987.41,100.32 -987.41,124.11 -966.83,144.7 -903.37,144.7 -858.22,189.85 U7.7@-858.22,219.79
NetR57_2: R57.2 U7.5 | length 422.7
  Top Layer w6: R57.2@-1264.14,100.23 -1264.14,126.56 -1204.75,185.95 -929.71,185.95 -921.22,194.44 U7.5@-921.22,219.79
NetR60_2: R60.2 U8.5 | length 208.4
  Top Layer w8: U8.5@-1501.25,337.5 -1419.22,337.5 -1394.45,362.27 v2(-1325.99,362.27)
  Bottom Layer w8: R60.2@-1326.69,384.86 -1326.34,384.51 -1326.34,362.61 v2(-1325.99,362.27)
NetU4_4: U4.4 U6.8 | length 848.4
  Top Layer w6: U6.8@-1772.96,662.44 -1771.92,661.4 -1771.92,627.35 -1766.48,621.91 -1709.66,621.91 -1697.12,609.36 -1617.4,609.36 -1589.05,637.71 -1589.05,850.46 -1566.3,873.2 -1349.47,873.2 -1315.77,839.51 -1315.77,791.49 -1304.48,780.2 U4.4@-1267.08,780.2
NetU4_23: U4.23 U6.14 | length 1058.9
  Top Layer w6: U6.14@-1891.07,662.44 -1890.63,662 -1890.63,610.87 v2(-1890.47,610.7) ; U4.23@-1078.12,473.12 -1078.12,551 -1054.05,575.06 v2(-1051.85,575.06)
  Bottom Layer w6: v2(-1890.47,610.7) -1887.81,610.7 -1880.95,603.84 -1631.08,603.84 -1555.21,527.98 -1406.49,527.98 -1406,528.47 -1371.21,528.47 -1370.72,527.98 -1248.61,527.98 -1202.58,574.01 -1052.9,574.01 v2(-1051.85,575.06)
NetU4_26: U4.26 U6.16 | length 1114.8
  Top Layer w6: U6.16@-1930.44,662.44 -1930.33,662.33 -1930.33,611.18 v2(-1930.28,611.13) ; v2(-1024.67,562.52) -1024.67,542.9 -1033.11,534.47 -1033.11,518.1 -1019.04,504.03 U4.26@-1019.04,473.11
  Bottom Layer w6: v2(-1930.28,611.13) -1909.9,590.78 -1634.98,590.78 -1560.18,515.98 -1401.52,515.98 -1401.03,516.47 -1376.18,516.47 -1375.69,515.98 -1243.64,515.98 -1202.55,557.06 -1033.38,557.06 -1027.92,562.52 v2(-1024.67,562.52)
NetU4_27: U4.27 U6.18 | length 1179
  Top Layer w6: v2(-1971.52,612.92) -1970.67,613.78 -1970.67,661.58 U6.18@-1969.81,662.44 ; U4.27@-999.36,473.11 -999.36,504.03 -982.89,520.51 v2(-982.89,544.24)
  Bottom Layer w6: v2(-1971.52,612.92) -1937.39,578.78 -1639.95,578.78 -1565.15,503.98 -1396.55,503.98 -1396.06,504.47 -1381.15,504.47 -1380.66,503.98 -1238.67,503.98 -1198.41,544.24 v2(-982.89,544.24)
NetU4_34: U4.34 U5.14 | length 411.1
  Top Layer w6: U4.34@-830.07,563.66 -572.87,563.66 -532.77,603.76 -485.34,603.76 -466.07,623.03 U5.14@-466.07,645.56
NetU4_35: U4.35 U5.16 | length 377
  Top Layer w6: U4.35@-830.07,583.35 -570.16,583.35 -537.74,615.76 -518.62,615.76 -505.44,628.94 U5.16@-505.44,662.44
NetU4_36: U4.36 U5.18 | length 331.5
  Top Layer w6: U4.36@-830.07,603.03 -686.59,603.03 -685.92,602.36 -568.12,602.36 -545.15,625.33 U5.18@-545.15,662.1
NetU4_37: U4.37 U6.13 | length 1149.3
  Top Layer w6: U6.13@-1871.39,662.44 -1870.76,661.82 -1870.76,624.08 v2(-1870.14,623.46) ; v2(-938.12,621.36) -937.44,622.04 -830.75,622.04 U4.37@-830.07,622.72
  Bottom Layer w6: v2(-1870.14,623.46) -1869.55,624.05 -1634.31,624.05 -1550.24,539.98 -1411.46,539.98 -1410.97,540.47 -1366.24,540.47 -1365.75,539.98 -1253.58,539.98 -1207.55,586.01 -1069.42,586.01 -1034.07,621.36 v2(-938.12,621.36)
NetU4_38: U4.38 U6.15 | length 1198.3
  Top Layer w6: U6.15@-1910.76,662.44 -1910.49,662.18 -1910.49,624.58 v2(-1910.23,624.32) ; v2(-954.08,641.89) -953.82,642.15 -832.56,642.15 U4.38@-832.3,641.89
  Bottom Layer w6: v2(-1910.23,624.32) -1909.75,624.32 -1892.61,641.46 -1634.75,641.46 -1545.27,551.98 -1416.43,551.98 -1415.94,552.47 -1361.27,552.47 -1360.78,551.98 -1258.55,551.98 -1212.52,598.01 -1075.72,598.01 -1031.85,641.89 v2(-954.08,641.89)
NetU4_39: U4.39 U6.17 | length 1244.5
  Top Layer w6: v2(-1950.17,624.56) -1950.15,658.41 U6.17@-1949.85,658.71 ; v2(-971.67,661.31) -971.28,661.7 -830.46,661.7 U4.39@-830.07,662.09
  Bottom Layer w6: v2(-1950.17,624.56) -1949.67,624.56 -1920.77,653.46 -1629.78,653.46 -1540.3,563.98 -1421.4,563.98 -1420.91,564.47 -1356.3,564.47 -1355.81,563.98 -1263.52,563.98 -1217.49,610.01 -1081.39,610.01 -1030.09,661.31 v2(-971.67,661.31)
NetU4_40: U4.40 U5.8 | length 546.7
  Top Layer w6: U4.40@-830.07,681.77 -740.66,681.77 v2(-739.33,680.44) ; U5.8@-347.96,662.44 -347.8,662.28 -347.8,622.88 v2(-347.65,622.72)
  Bottom Layer w6: v2(-739.33,680.44) -405.68,680.44 -347.96,622.72 v2(-347.65,622.72)
NetU4_41: U4.41 U5.13 | length 424.2
  Top Layer w6: U4.41@-830.07,701.46 -765.04,701.46 -764.95,701.55 -726.69,701.55 v2(-726.59,701.65) ; U5.13@-446.39,662.44 -446.3,662.52 -446.3,702.13 v2(-446.22,702.21)
  Bottom Layer w6: v2(-726.59,701.65) -726.4,701.46 -446.97,701.46 v2(-446.22,702.21)
NetU4_42: U4.42 U5.15 | length 419.3
  Top Layer w6: U4.42@-830.07,721.14 -773.31,721.14 v2(-754.28,740.17) ; v2(-485.96,720.5) -485.86,720.4 -485.86,662.54 U5.15@-485.76,662.44
  Bottom Layer w6: v2(-754.28,740.17) -503.91,740.17 -485.96,722.21 v2(-485.96,720.5)
NetU4_43: U4.43 U5.17 | length 373.4
  Top Layer w6: U4.43@-830.07,740.83 -828.96,741.94 -782.91,741.94 v2(-781.54,743.3) ; U5.17@-525.13,662.44 -524.8,662.77 -524.8,719.32 v2(-524.47,719.65)
  Bottom Layer w6: v2@-781.54,741.98 -759.21,719.65 v2(-524.47,719.65)
nFAULT: R24.1 R40.1 U4.54 | length 1743.7
  Top Layer w6: R40.1@-1630.54,801.42 -1630.54,899.01 -1516.37,1013.18 -1036.66,1013.18 -999.63,976.15 -999.63,910.39 U4.54@-999.36,910.12 ; v2(-832.94,975.54) -832.06,976.42 -784,976.42 -781.31,976.42 -742.27,937.38 -378.71,937.38 -286.49,845.16 -225.49,845.16 -200.68,820.35 R24.1@-200.68,798.57
  Bottom Layer w6: v2(-999.9,976.42) -999.46,975.98 -833.37,975.98 v2(-832.94,975.54)
nRST: C28.2 U4.7 | length 78.6
  Top Layer w8: U4.7@-1267.08,721.14 -1266.35,721.87 -1228.11,721.87 -1221.64,728.34 v2(-1218.94,728.34)
  Bottom Layer w6: C28.2@-1245.35,725.65 -1242.66,728.34 v2(-1218.94,728.34)
OSC_N: C30.1 U4.6 X1.1 | length 242.6
  Top Layer w6: X1.1@-1446.76,713.73 -1446.76,718.65 -1420.7,744.71 -1400.35,744.71 C30.1@-1380.26,724.61 ; C30.1@-1380.26,723.63 C30.1@-1380.26,724.61 ; U4.6@-1297.64,740.83 U4.6@-1267.08,740.83 ; U4.6@-1267.08,742.43 -1297.64,742.43 -1362.44,742.43 C30.1@-1380.26,724.61
OSC_P: C29.1 U4.5 X1.3 | length 268.8
  Top Layer w6: X1.3@-1509.75,800.34 -1509.75,795.42 -1473.96,759.63 -1400.45,759.63 -1388.07,772.01 C29.1@-1387.08,772.01 ; C29.1@-1380.26,779.33 -1380.26,778.84 -1361.93,760.51 U4.5@-1267.08,760.51
PGND: C7.1 C8.1 C9.1 C10.1 C11.1 C12.1 C13.1 C14.1 C15.1 C16.1 C17.1 C18.1 C19.1 C50.1 C65.1 C69.1 D1.2 FB1.2 FB2.1 J1.2 NT1.2 NT4.2 NT5.2 NT6.1 NT9.2 NT10.2 NT11.1 Q4.S Q10.S Q14.S R35.1 R36.1 R50.1 R51.1 R59.2 U7.4 U7.9 | length 4789.8
  Top Layer w6: v2(-2110.72,177.68) -2110.72,180.92 -2104.54,187.1 -2104.54,187.51 -2104.61,187.58 NT10.2@-2104.61,195.33 ; v2(-1998.26,176.8) -1991.5,183.57 -1991.5,192.33 ; v2(-680.03,177.38) -680.03,178.29 -674.99,183.33 -674.99,192.33 ; v2(-575.48,177.35) -575.36,177.35 -569.32,183.39 -569.32,192.33 ; v2(-367.65,260.15) -367.65,275.15 ; v2(-322.32,213.23) -322.32,211.57 -255.44,144.7 -255.44,-189.95 -247.04,-198.36 v1(-247.04,-200.47)
  Top Layer w8: U7.9@-921.54,331.27 -921.22,331.59 U7.4@-921.22,369
  Top Layer w10: Q4.S@-224.97,-234.34 -228.22,-231.09 -227.58,-230.46 v1(-221.09,-230.46)
  Power w20: -2569.78,130.22 -2569.78,218.3 -2514.26,273.81 -2347.23,273.81 -2285.35,335.69 -2201.4,335.69 -2130.88,406.2 -2130.88,426.2 v2(-2130.1,426.99) -2129.39,426.99 v2(-2108.27,448.11) ; -863.27,330.65 -737.3,456.61 v2(-651.16,456.61)
  Signal w6: v2(-2125,-195) -2125.87,-195 -2135.39,-204.51 -2135.39,-221.24 -2123.42,-233.2 -1991.87,-233.2 -1925.59,-166.93 -1925.59,51.57 -1945.34,71.32 -2032.98,71.32 -2103.57,141.9 -2103.57,167.28 -2110.72,174.43 v2(-2110.72,177.68) ; v2(-1998.26,176.8) -1998.26,176.05 -1991.66,169.45 -1991.66,127.05 -1968.79,104.17 -1734.98,104.17 -1696.48,65.68 -1696.48,-176.51 -1749.28,-229.3 -1802.56,-229.3 -1812.2,-219.65 -1812.2,-208.95 -1798.25,-195 v2(-1795,-195) ; NT6.1@-1650.99,-155.6 -1650.99,-167.82 -1618.34,-200.47 v1(-1572.88,-200.47) ; v2(-802.45,-195) -812.01,-204.56 -812.01,-220.19 -801.11,-231.09 -638,-231.09 -610.83,-203.92 -610.83,48.32 -672.64,110.13 -672.64,167.87 -680.03,175.25 v2(-680.03,177.38) ; v2(-575.48,177.35) -575.48,174.1 -567.81,166.43 -567.81,139.64 -532.59,104.43 -414.36,104.43 -341,31.07 -341,-182.75 -389.34,-231.09 -474.72,-231.09 -488.63,-217.19 -488.63,-207.36 v2(-476.27,-195)
  Bottom Layer w6: R59.2@-1384.69,-398.98 -1385.19,-398.48 -1359.72,-398.48 -1338.47,-419.73 NT11.1@-1338.47,-450.21 ; v2(-367.65,260.15) -322.32,214.82 v2(-322.32,213.23)
  Bottom Layer w10: v2(-2130.1,426.99) -2129.99,426.88 -2108.38,426.88 C65.1@-2108.27,426.77 v2(-2108.27,448.11) ; v2@-669.02,449.33 -669.02,437.6 C50.1@-663.19,431.77 -657.37,437.6 -657.37,448.24 ; v1(-221.09,-260.45) -220.45,-261.09 -208.22,-261.09 -207.58,-261.73 ; v1(-221.09,-230.46) -220.45,-231.09 -208.22,-231.09 -207.58,-231.73
  other v1: -2516.74,-410.17 -2486.75,-410.17 -2456.76,-410.17 -2426.76,-410.17 -2396.77,-410.17 -2366.77,-410 -2498.56,-385.28 -2468.57,-385.28 -2438.57,-385.28 -2408.58,-385.28 -2378.58,-385.28 -2516.74,-360.1 -2486.75,-360.1 -2456.76,-360.1 -2426.76,-360.1 -2396.77,-360.1 -2366.77,-360.1 -1572.88,-350.44 -1546.93,-350.44 -1520.98,-350.44 -1213.46,-350.44 -1187.51,-350.44 -247.04,-350.44 -221.09,-350.44 -195.14,-350.44 -2498.56,-335.21 -2468.57,-335.21 -2438.57,-335.21 -2408.58,-335.21 -2378.58,-335.21 -1572.88,-320.44 -1546.93,-320.44 -1520.98,-320.44 -1213.46,-320.44 -1187.51,-320.44 -247.04,-320.44 -221.09,-320.44 -195.14,-320.44 -2516.74,-310.03 -2486.75,-310.03 -2456.76,-310.03 -2426.76,-310.03 -2396.77,-310.03 -2366.77,-310.03 -1572.88,-290.45 -1546.93,-290.45 -1520.98,-290.45 -1213.46,-290.45 -1187.51,-290.45 -247.04,-290.45 -221.09,-290.45 -195.14,-290.45 -2498.56,-285.14 -2468.57,-285.14 -2438.57,-285.14 -2408.58,-285.14 -2378.58,-285.14 -2516.74,-259.95 -2486.75,-259.95 -2456.76,-259.95 -2426.76,-259.95 -2396.77,-259.95 -2366.77,-259.95 -1572.88,-260.45 -1546.93,-260.45 -1520.98,-260.45 -1213.46,-260.45 -1187.51,-260.45 -247.04,-260.45 -195.14,-260.45 -1572.88,-230.46 -1546.93,-230.46 -1520.98,-230.46 -1213.46,-230.46 -1187.51,-230.46 -247.04,-230.46 -195.14,-230.46 -1546.93,-200.47 -1520.98,-200.47 -1213.46,-200.47 -1187.51,-200.47 -221.09,-200.47 -195.14,-200.47 -2406.14,97.57 -2491.54,99.52 -2522.55,127.14 -2448.49,128.24 -2365.72,127.52
  other v2: -873.97,264.73 -904.62,294.4 -873.97,294.4 -843.66,295.73 -873.97,325.05 -674.14,456.61
SENSE_N: J9.2 R58.1 R59.1 | length 980.2
  Top Layer w6: v2@-1405.56,164.7 -1371.46,164.7 -1358.46,177.7 -1358.46,187.71 -1350.83,195.34 R58.1@-1350.59,195.34
  Signal w6: v2(-1405.56,163.97) -1405.56,160.91 -1412.01,154.46 -1412.01,76.71 -1274.11,-61.19 -1274.11,-481.72 -1264.14,-491.69 v1(-1264.14,-492.24)
  Bottom Layer w6: v1(-1338.47,-622.66) -1338.47,-539.99 -1330.38,-531.9 -1287.13,-531.9 -1273.85,-518.61 -1273.85,-505.02 -1264.14,-495.31 v1(-1264.14,-492.24)
  other v1: -1430.29,-714.48 -1399.68,-714.48 -1369.08,-714.48 -1338.47,-714.48 -1430.29,-683.87 -1399.68,-683.87 -1369.08,-683.87 -1338.47,-683.87 -1430.29,-653.27 -1399.68,-653.27 -1369.08,-653.27 -1338.47,-653.27 -1430.29,-622.66 -1399.68,-622.66 -1369.08,-622.66
SENSE_P: C70.1 NT11.2 U8.8 | length 1002.4
  Top Layer w6: U8.8@-1501.25,260.72 -1491.3,260.72 -1487.45,256.87 -1487.45,195.34 -1486.47,195.34 -1478.64,187.51 -1478.64,184 -1478.64,177.3 -1465.31,163.97 v2(-1430.29,163.97)
  Signal w6: v2(-1430.29,163.97) -1430.29,160.72 -1424.26,154.69 -1424.26,71.99 -1286.11,-66.16 -1286.11,-481.72 -1295.53,-491.14 v1(-1295.53,-492.24)
  Bottom Layer w6: -1338.47,-465.21 -1338.47,-497.22 -1338.41,-497.29 -1338.41,-510.04 -1328.55,-519.9 -1292.1,-519.9 -1285.85,-513.64 -1285.85,-505.26 -1295.53,-495.57 v1(-1295.53,-492.24)
SH_A: C39.1 J7.3 Q1.S Q4.D U5.42 | length 648.7
  Top Layer w6: U5.42@-328.28,364.17 -327.98,363.88 -327.98,322.55 v2(-327.69,322.26) -327.69,253.55 -202.51,128.37 -88.65,128.37 -43.19,82.91 -43.19,-23.32 -28.16,-38.35 -16.65,-38.35 Q1.S@-4.88,-50.11
  Bottom Layer w6: C39.1@-336.15,345.45 -335.52,345.45 -327.69,337.63 v2(-327.69,322.26)
SH_A_nP: C54.1 J8.3 Q7.S Q10.D U6.42 | length 736.3
  Top Layer w6: U6.42@-1753.28,364.17 -1753.28,303.28 -1573.34,123.34 -1402.36,123.34 -1370.07,91.06 -1370.07,-20.73 -1352.46,-38.35 -1344.41,-38.35 Q7.S@-1332.64,-50.11
  Bottom Layer w6: C54.1@-1761.31,345.45 -1761.1,345.45 -1753.28,337.63 v2(-1753.28,305.99)
SH_B: C42.1 J7.2 Q2.S Q5.D U5.37 | length 487.7
  Top Layer w6: U5.37@-426.7,364.17 -426.63,364.1 -426.63,322.49 v2(-426.57,322.43) -426.57,239.76 -368.9,182.1 -368.9,-32.92 -360.58,-41.24 -344.28,-41.24 Q2.S@-335.41,-50.11
  Bottom Layer w6: v2(-426.57,322.43) -426.57,345.32 -426.7,345.45 C42.1@-424.58,347.58
SH_B_nP: C57.1 J8.2 Q8.S Q11.D U6.37 | length 542.6
  Top Layer w6: U6.37@-1851.7,364.17 -1851.7,305.06 -1690.03,143.39 -1690.03,-22.58 -1673.89,-38.71 -1661.29,-38.71 Q8.S@-1650,-50
  Bottom Layer w6: v2(-1851.7,305.99) C57.1@-1851.7,343.49
SH_C: C43.1 J7.1 Q3.S Q6.D U5.32 | length 617.1
  Top Layer w6: Q3.S@-660,-50.11 -671.76,-38.35 -681.21,-38.35 -696.7,-22.86 -696.7,88.21 -637.56,147.35 -528.14,147.35 -498.15,177.35 -498.15,282.63 -522.17,306.65 -522.17,319.97 v2(-524.47,322.26) -524.8,322.59 -524.8,363.84 U5.32@-525.13,364.17
  Bottom Layer w6: v2(-524.47,322.26) -524.47,344.8 C43.1@-523,346.27
SH_C_nP: C58.1 J8.1 Q9.S Q12.D U6.32 | length 543.2
  Top Layer w6: Q9.S@-1970,-50 -1980.74,-39.26 -1998.77,-39.26 -2005.19,-32.83 -2005.19,116.32 -1989.4,132.11 -1963.24,132.11 -1920.69,174.67 -1920.69,277.85 -1948.01,305.18 v2(-1949.17,305.18) -1949.65,305.66 -1949.65,363.69 U6.32@-1950.13,364.17
  Bottom Layer w6: v2(-1949.17,305.18) C58.1@-1949.17,344.44 C58.1@-1948.16,345.45
SL_A: NT1.1 U5.40 | length 74
  Top Layer w6: NT1.1@-367.65,290.15 U5.40@-367.65,364.17
SL_A_nP: NT6.2 U6.40 | length 565
  Top Layer w6: U6.40@-1792.65,364.17 -1792.65,289.72 -1699.14,196.21 v2(-1696.48,196.21)
  Signal w6: v2(-1696.48,196.21) -1696.48,113.65 -1650.99,68.15 -1650.99,-140.6
SL_B: NT2.2 Q5.S R35.2 U5.35 | length 1342.8
  Top Layer w6: -554.36,192.33 -554.36,184.29 v2(-547.44,177.38) ; v1(-545.43,-350.44) -541.27,-346.28 -537.11,-350.44 v1(-519.48,-350.44) ; Q5.S@-541.32,-243.75 Q5.S@-539.32,-243.75 ; v1(-519.48,-260.45) -519.48,-253.51 -529.55,-253.51 Q5.S@-539.32,-243.75 ; v1(-519.48,-230.46) -519.48,-231.38 -531.85,-243.75 Q5.S@-539.32,-243.75 ; v2(-466.07,202.07) U5.35@-466.07,364.17
  Signal w6: v1(-519.48,-200.47) -516.8,-203.14 -508.94,-203.14 -500.63,-211.45 -500.63,-222.63 -479.2,-244.05 -382.73,-244.05 -329,-190.33 -329,36.9 -409.28,117.17 -527.5,117.17 -555.09,144.77 -555.09,166.67 -547.44,174.32 v2(-547.44,177.38) -522.75,202.07 v2(-466.07,202.07)
  Bottom Layer w6: v1(-571.38,-350.44) v1(-571.38,-320.44) ; v1(-545.43,-350.44) v1(-545.43,-320.44)
  Bottom Layer w10: R35.2@-547.27,-290.45 -522.52,-290.45 v1@-519.48,-293.49 ; v1(-519.48,-350.44) v1(-519.48,-320.44) v1@-519.48,-293.49 ; v1(-519.48,-290.45) v1@-519.48,-293.49 ; v1(-519.48,-230.46) v1(-519.48,-260.45) v1@-519.48,-293.49
  other v1: -571.38,-290.45 -545.43,-290.45 -571.38,-260.45 -545.43,-260.45 -571.38,-230.46 -545.43,-230.46 -571.38,-200.47 -545.43,-200.47
SL_B_nP: NT7.2 Q11.S R50.2 U6.35 | length 1299.2
  Top Layer w6: -1978.5,192.33 -1978.5,183.33 -1972.34,177.18 v2(-1972.34,176.8) ; U6.35@-1891.07,364.17 -1890.78,363.88 -1890.78,274.1 v2(-1890.49,273.81)
  Signal w6: v2(-1972.34,176.8) -1972.34,174.22 -1979.28,167.29 -1979.28,133.92 -1963.54,118.17 -1729.37,118.17 -1680.99,69.79 -1680.99,-181.01 -1741.28,-241.3 -1808.13,-241.3 -1824.33,-225.1 -1824.33,-209.04 -1831.91,-201.47 -1845.24,-201.47 v1(-1846.25,-200.47) ; v2@-1970.05,178.84 -1970.05,194.26 v2(-1890.49,273.81)
  Bottom Layer w6: v1(-1898.14,-350.44) v1(-1898.14,-320.44) ; v1(-1872.2,-350.44) v1(-1872.2,-320.44)
  Bottom Layer w10: R50.2@-1873.18,-283.49 -1872.2,-284.48 v1(-1872.2,-290.45) ; R50.2@-1873.18,-273.49 -1873.18,-282.09 -1872.2,-283.08 -1846.25,-283.08 v1(-1846.25,-260.45) v1(-1846.25,-230.46) ; v1@-1847.2,-283.08 -1847.2,-289.5 v1(-1846.25,-290.45) ; v1(-1846.25,-350.44) v1(-1846.25,-320.44) v1@-1846.25,-289.5
  other v1: -1898.14,-290.45 -1898.14,-260.45 -1872.2,-260.45 -1898.14,-230.46 -1872.2,-230.46 -1898.14,-200.47 -1872.2,-200.47
SL_C: NT3.2 Q6.S R36.2 U5.30 | length 1168.6
  Top Layer w6: v1(-871.46,-350.44) -867.3,-346.28 -863.14,-350.44 v1(-845.51,-350.44) ; v1(-845.51,-230.46) -845.51,-231.38 -857.88,-243.75 Q6.S@-864.96,-243.75 -855.2,-253.51 Q6.S@-845.51,-253.51 ; -658.94,192.33 -658.94,183.33 -654.37,178.75 v2(-654.37,177.23) ; U5.30@-564.5,364.17 -562.98,362.66 -562.98,295.91 v2(-561.47,294.4) ; v1(-845.51,-260.45) Q6.S@-845.51,-253.51 ; v1(-845.51,-260.45) Q6.S@-845.51,-253.51 ; v1(-845.51,-260.45) Q6.S@-845.51,-253.51
  Signal w6: v1(-845.51,-200.47) -845.22,-200.76 -830.93,-200.76 -824.27,-207.43 -824.27,-224.91 -805.12,-244.05 -633.99,-244.05 -598.83,-208.89 -598.83,53.29 -660.08,114.54 -660.08,168.27 -654.37,173.98 v2(-654.37,177.23) -654.37,201.5 v2(-561.47,294.4)
  Bottom Layer w6: v1(-871.46,-350.44) v1(-871.46,-320.44)
  Bottom Layer w10: v1(-897.41,-350.44) v1(-897.41,-320.44) ; R36.2@-897.41,-293.49 v1(-897.41,-290.45) ; v1(-897.41,-260.45) v1(-897.41,-230.46) ; v1(-871.46,-290.45) -868.42,-293.49 -868.42,-292.03 -866.84,-290.45 v1(-845.51,-290.45)
  other v1: -845.51,-320.44 -871.46,-260.45 -871.46,-230.46 -897.41,-200.47 -871.46,-200.47